# EAGLE board 3PScombo (EAGLE 7.2.0)
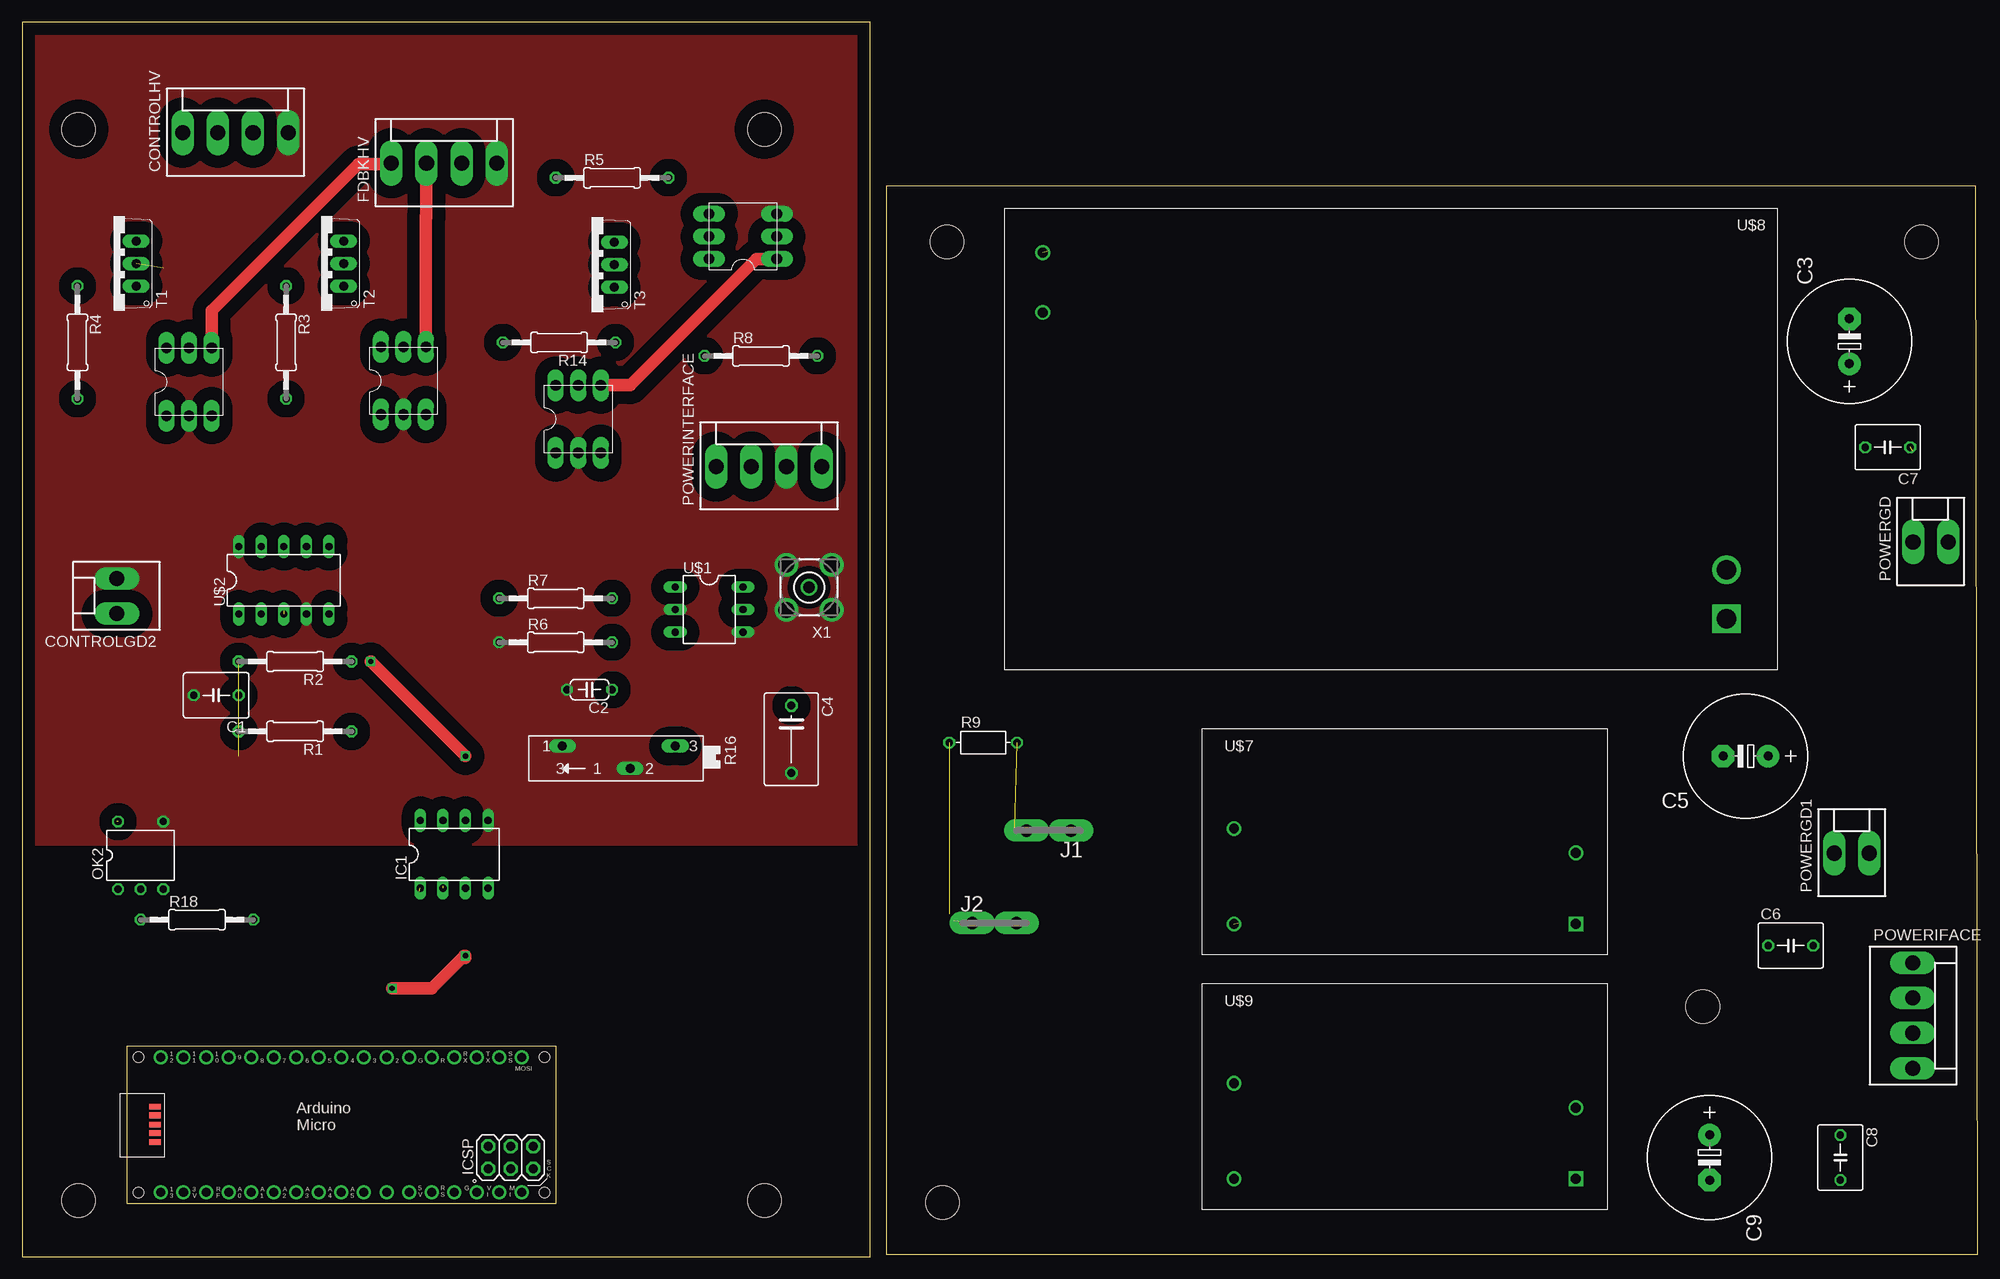
[diagram p0: board, top side]
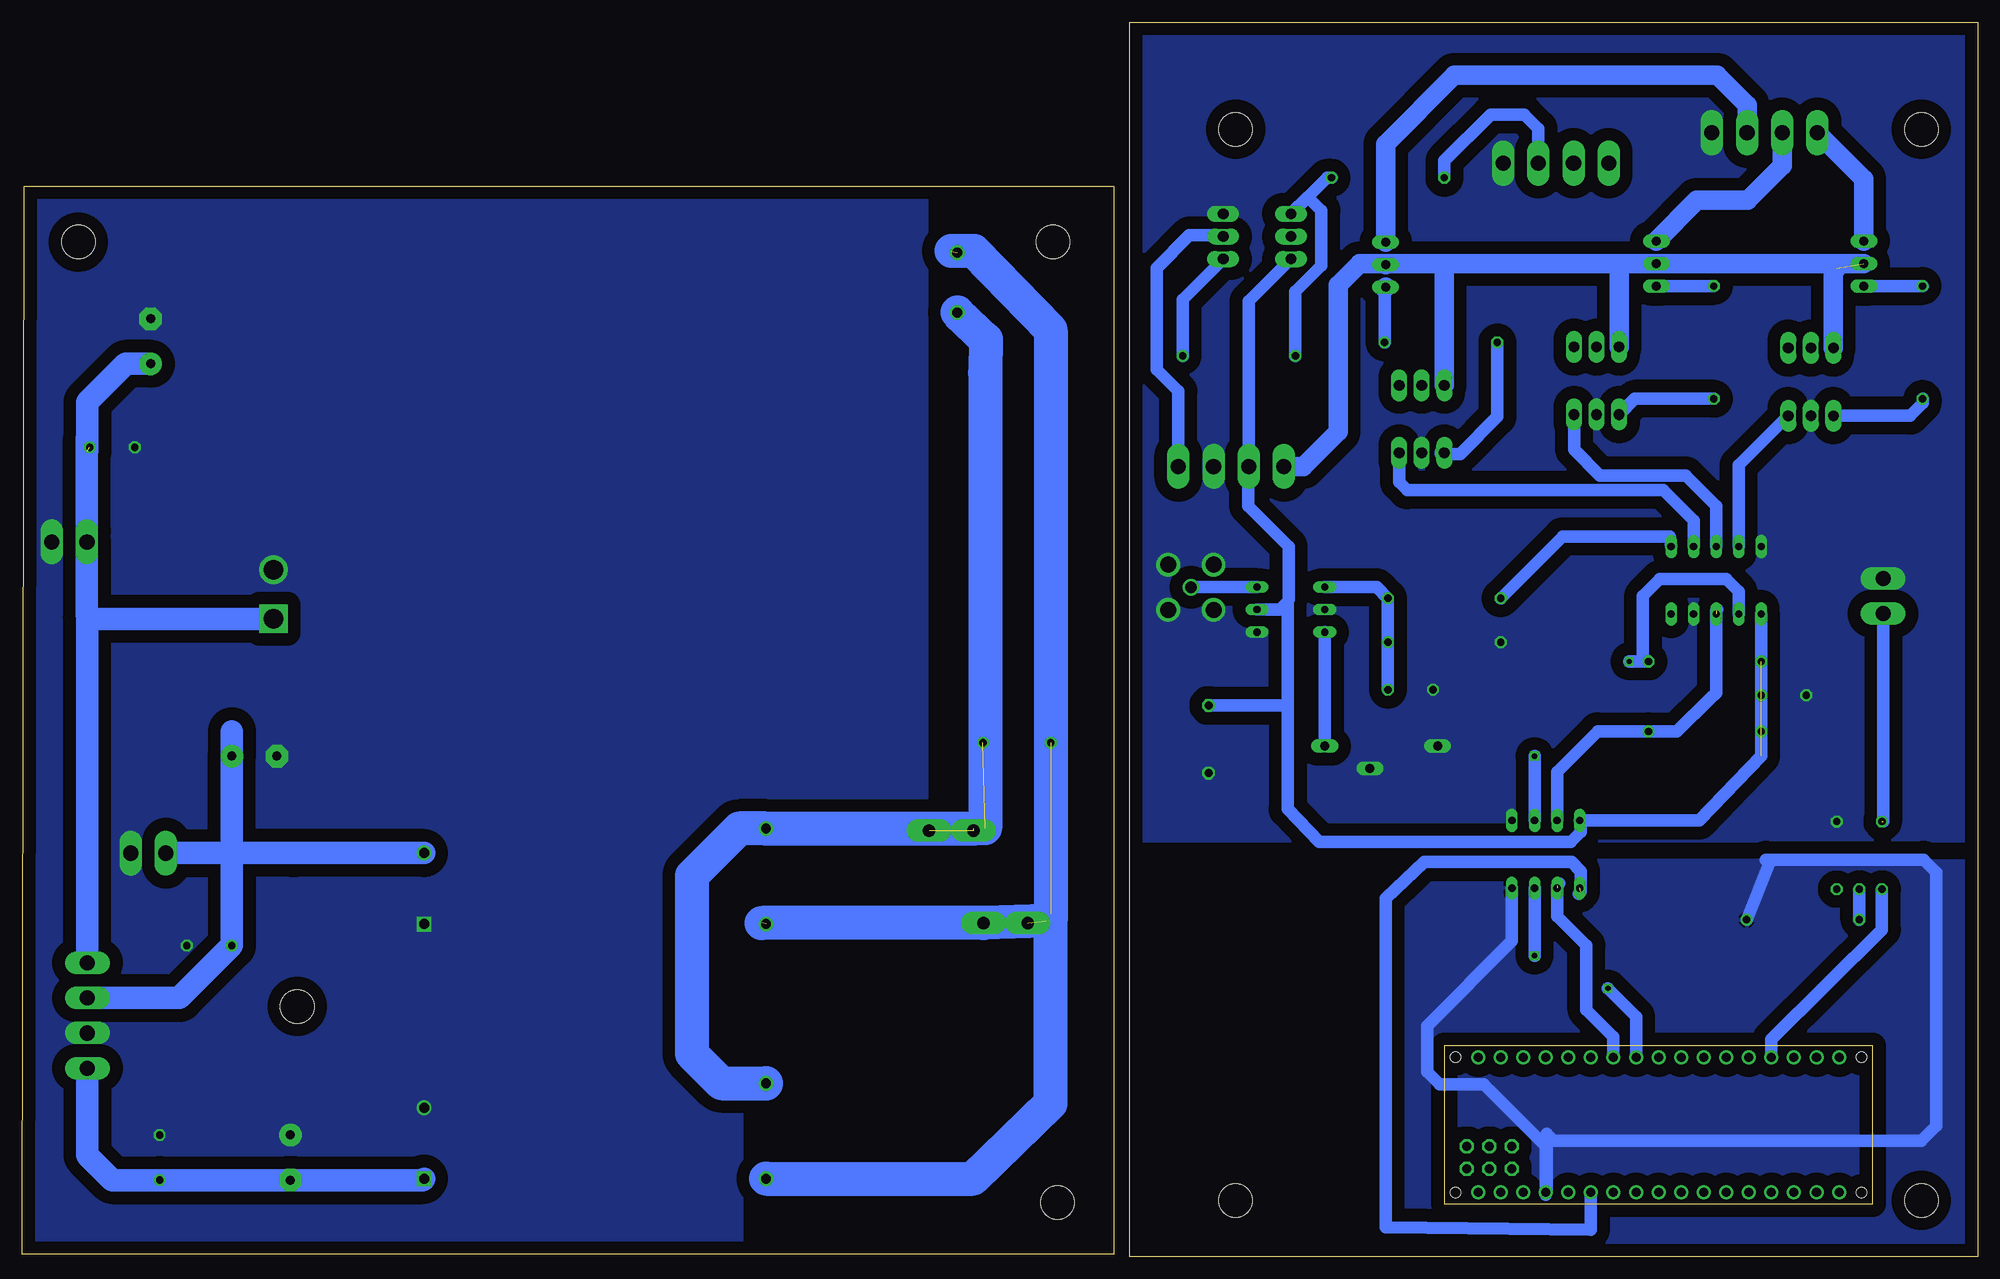
[diagram p1: board, bottom side, seen from below]

Size 220.2 x 139.06 mm. Coordinates in mm from the lower left corner, seen from the top.
Outline: 0,0 95.5,0 95.5,139.06 0,139.06 0,0
Outline: 97.28,0.25 220.2,0.25 219.94,120.57 97.28,120.57 97.28,0.25
Copper layers (1*16): Top 0.035mm / dielectric 1.5mm / Bottom 0.035mm
Design rules "default": minimum track width 10mil, minimum drill 24mil, track to track 8mil, track to pad 8mil, pad to pad 8mil, via to via 8mil, smd to smd 8mil, copper to edge 40mil, drill to drill 8mil, minimum pad ring 10mil, minimum via ring 8mil, stop-mask expansion 4mil, vias tented up to drill 0mil, thermal gap 10mil
Holes 3.8 mm at 83.57,6.35 83.57,127 6.35,127 6.35,6.35 213.87,114.3 189.23,28.19 104.14,114.3 103.63,6.1

## Footprints (pad centres in the part's own frame; a part is rotated, then mirrored left to right if it is on the bottom)
C050-050X075 = drill 0.813 octagon: 1 -2.54,0; 2 2.54,0
C050-024X044 = drill 0.813 octagon: 1 -2.54,0; 2 2.54,0
E5-13 = drill 1.016 pad 2.54: + -2.54,0 | drill 1.016 pad 2.54 octagon: - 2.54,0
C075-063X106 = drill 0.914 octagon: 1 -3.81,0; 2 3.81,0
KK-156-2 = drill 1.7 pad 2.184 long: 1 -1.98,0; 2 1.98,0
KK-156-4 = drill 1.7 pad 2.184 long: 1 -5.94,0; 2 -1.98,0; 3 1.98,0; 4 5.94,0
DIL08 = drill 0.813 long: 1 -3.81,-3.81; 2 -1.27,-3.81; 3 1.27,-3.81; 4 3.81,-3.81; 5 3.81,3.81; 6 1.27,3.81; 7 -1.27,3.81; 8 -3.81,3.81
F061.100 = drill 1.4 pad 2.54 long: A1 -2.5,0; A2 2.5,0
DIL05 = drill 0.813 octagon: 1 -2.54,-3.81; 2 0,-3.81; 3 2.54,-3.81; 4 2.54,3.81; 6 -2.54,3.81
ARDUINO_MICRO = drill 1.016 pad 1.575: 3V3 6.35,1.27; +5V 31.75,1.27; A0 11.43,1.27; A1 13.97,1.27; A2 16.51,1.27; A3 19.05,1.27; A4 21.59,1.27; A5 24.13,1.27; D2 29.21,16.51; D3 26.67,16.51; D4 24.13,16.51; D5 21.59,16.51; D6 19.05,16.51; D7 16.51,16.51; D8 13.97,16.51; D9 11.43,16.51; D10 8.89,16.51; D11 6.35,16.51; D12 3.81,16.51; D13 3.81,1.27; GND 31.75,16.51; GND. 36.83,1.27; MISO] 41.91,1.27; MOSI 44.45,16.51; NC 26.67,1.27; NC. 29.21,1.27; REF 8.89,1.27; RST 34.29,16.51; RST. 34.29,1.27; RX1 36.83,16.51; SCK 44.45,1.27; SS 41.91,16.51; TX1 39.37,16.51; VIN 39.37,1.27 | drill 1.016 pad 1.575 octagon: 5V 40.64,6.477; GND_ 45.72,6.477; MISO. 40.64,3.937; MOSI. 43.18,6.477; RESET.. 45.72,3.937; SCK. 43.18,3.937 | smd 1.27 x 0.635: <USB>+V 3.15,10.947; <USB>D+ 3.15,9.957; <USB>D- 3.15,8.941; <USB>GND 3.15,6.96; <USB>ID 3.15,7.976 | hole 1.2: 1.27,1.27; 1.27,16.51; 46.99,16.51; 46.99,1.27
0207/12 = drill 0.813 octagon: 1 -6.35,0; 2 6.35,0
R-7,5 = drill 0.813 octagon: 1 -3.81,0; 2 3.81,0
SP19L = drill 1.016 long: A 5.715,-1.27; E -6.985,-1.27; S -1.905,1.27
TO220V = drill 1.016 long: 1 -2.54,-2.54; 2 0,-2.54; 3 2.54,-2.54
DIL06 = drill 0.813 long: DIV 2.54,3.81; GND 0,-3.81; MOD -2.54,-3.81; OUT -2.54,3.81; SET 2.54,-3.81; VCC 0,3.81
DIL10 = drill 0.813 long: 1 -5.08,-3.81; 2 -2.54,-3.81; 3 0,-3.81; 4 2.54,-3.81; 5 5.08,-3.81; 6 5.08,3.81; 7 2.54,3.81; 8 0,3.81; 9 -2.54,3.81; 10 -5.08,3.81
DIL6 = drill 1.2 long: P$1 -2.54,-3.81; P$2 0,-3.81; P$3 2.54,-3.81; P$4 2.54,3.81; P$5 0,3.81; P$6 -2.54,3.81
IRM-05-05 = drill 1.1: +V 42.1,11.45; ACL 3.6,3.45; ACN 3.6,14.2 | drill 1.1 square: -V 42.1,3.45
IRM-60-12 = drill 2.2 square: P$1 5.7,46.25 | drill 2.2: P$2 5.7,40.75 | drill 1.1: P$3 82.7,5; P$4 82.7,11.75
BU-SMA-V = drill 1.27: 1 0,0 | drill 1.778: 2 -2.55,2.55; 3 2.55,2.55; 4 2.55,-2.55; 5 -2.55,-2.55

## Placement (x,y rotation side)
C1  [C050-050X075]  21.84,63.25 180 top
C2  10n  [C050-024X044]  63.88,63.88 180 top
C3  [E5-13]  205.74,103.12 90 top
C4  [C075-063X106]  86.61,58.29 270 top
C5  [E5-13]  194.06,56.39 180 top
C6  [C050-050X075]  199.14,35.05 0 top
C7  [C050-050X075]  210.06,91.19 180 top
C8  [C050-050X075]  204.72,11.18 270 top
C9  [E5-13]  189.99,11.18 270 top
CONTROLGD2  [KK-156-2]  10.67,74.42 90 top
CONTROLHV  [KK-156-4]  24,126.62 0 top
FDBKHV  [KK-156-4]  47.5,123.19 0 top
IC1  ISO1540  [DIL08]  48.64,45.34 0 top
J1  PIN2F061.100  [F061.100]  115.57,48.01 180 top
J2  PIN2F061.100  [F061.100]  109.47,37.59 0 top
OK2  H11F1  [DIL05]  13.34,45.21 0 top
PCB1  ARDUINO_MICRO  [ARDUINO_MICRO]  11.81,5.97 0 top
POWERGD  [KK-156-2]  214.88,80.52 0 top
POWERGD1  [KK-156-2]  205.99,45.47 0 top
POWERIFACE  [KK-156-4]  212.85,27.18 270 top
POWERINTERFACE  [KK-156-4]  84.07,89.03 0 top
R1  1.5k  [0207/12]  30.73,59.18 180 top
R2  1.5k  [0207/12]  30.73,67.06 180 top
R3  1k  [0207/12]  29.72,103 270 top
R4  1k  [0207/12]  6.22,103 270 top
R5  1k  [0207/12]  66.42,121.54 0 top
R6  10k  [0207/12]  60.07,69.22 0 top
R7  40k  [0207/12]  60.07,74.17 0 top
R8  1k  [0207/12]  83.19,101.47 0 top
R9  VARISTOR-7,5  [R-7,5]  108.2,57.91 0 top
R14  1k  [0207/12]  60.45,103 180 top
R16  [SP19L]  66.55,56.26 180 top
R18  100  [0207/12]  19.68,37.97 0 top
T1  TIP122V  [TO220V]  10.29,111.89 90 top
T2  TIP122V  [TO220V]  33.66,111.89 90 top
T3  TIP122V  [TO220V]  64.14,111.76 90 top
U$1  LTC6992  [DIL06]  77.34,72.9 270 top
U$2  MCP4728DIL  [DIL10]  29.46,76.2 0 top
U$3  OPA735DIL  [DIL6]  81.15,114.94 90 top
U$4  OPA735DIL  [DIL6]  62.61,94.36 0 top
U$5  OPA735DIL  [DIL6]  42.93,98.68 0 top
U$6  OPA735DIL  [DIL6]  18.8,98.55 0 top
U$7  IRM-05-05  [IRM-05-05]  132.84,34.04 0 top
U$8  IRM-60-12  [IRM-60-12]  197.61,118.11 180 top
U$9  IRM-05-05  [IRM-05-05]  132.84,5.33 0 top
X1  BU-SMA-V  [BU-SMA-V]  88.6,75.41 180 top

## Library data of the parts
C1 C3 C5-C9 R18 = rcl
C2 C4 R1-R8 R14 = resistor
CONTROLGD2 CONTROLHV FDBKHV POWERGD POWERGD1 POWERIFACE POWERINTERFACE = con-molex; OC_FARNELL: unknown; OC_NEWARK: unknown
IC1 U$3-U$6 = texas
J1 J2 = con-faston; OC_FARNELL: unknown; OC_NEWARK: unknown
OK2 = optocoupler; OC_FARNELL: unknown; OC_NEWARK: unknown
PCB1 = E14_Arduino_published
R9 = varistor
R16 = pot
T1-T3 = transistor-npn
U$1 = linear-technology
U$2 = microchip
U$7-U$9 = meanwell
X1 = con-coax; OC_FARNELL: unknown; OC_NEWARK: unknown

## Nets
+12V: POWERINTERFACE.1 T1.2 T2.2 T3.2 U$4.P$6 U$5.P$6 U$6.P$6
+12V1: C3.+ C7.1 POWERGD.1 POWERIFACE.1 U$8.P$1
-5V: POWERINTERFACE.4 U$3.P$2
-5V1: C8.2 C9.- POWERIFACE.4 U$9.-V
A+5: IC1.1 PCB1.+5V
AGND: IC1.4 PCB1.GND. R18.2
D4: PCB1.D4
D7: PCB1.D7
D8: PCB1.D8
D10: PCB1.D10
D11: PCB1.D11
ENSW2: CONTROLGD2.1 OK2.6
GND: C1.2 C2.2 C4.2 CONTROLGD2.2 CONTROLHV.4 FDBKHV.4 IC1.5 OK2.4 POWERINTERFACE.3 R6.1 R16.A R16.S U$1.DIV U$1.GND U$2.4 U$2.10 U$3.P$3 U$4.P$2 U$5.P$2 U$6.P$2 X1.2 X1.3 X1.4 X1.5
GND1: C3.- C5.- C6.2 C7.2 C8.1 C9.+ POWERGD1.2 POWERGD.2 POWERIFACE.3 U$7.-V U$8.P$2 U$9.+V
N$1: R7.1 U$2.6
N$2: C2.1 R6.2 R7.2 U$1.MOD
N$3: R4.1 T1.1
N$4: CONTROLHV.1 T1.3
N$5: CONTROLHV.3 T3.3
N$6: FDBKHV.2 U$5.P$4
N$7: OK2.2 R18.1
N$8: FDBKHV.1 U$6.P$4
N$9: FDBKHV.3 R5.1
N$10: R3.2 U$5.P$1
N$11: CONTROLHV.2 T2.3
N$12: R16.E U$1.SET
N$13: U$1.OUT X1.1
N$14: R8.2 U$3.P$1 U$4.P$4
N$15: R14.1 T3.1
N$16: U$2.9 U$6.P$3
N$17: U$2.8 U$5.P$3
N$18: U$2.7 U$4.P$3
N$19: R4.2 U$6.P$1
N$20: R3.1 T2.1
N$21: R14.2 U$4.P$1
N$23: R5.2 R8.1 U$3.P$4
N$24: J1.A1 J1.A2 R9.2 U$7.ACN U$8.P$4 U$9.ACN
N$25: J2.A1 J2.A2 R9.1 U$7.ACL U$8.P$3 U$9.ACL
PWM5: PCB1.D5
PWM6: PCB1.D6
PWM9: OK2.1 PCB1.D9
SCL: IC1.3 PCB1.D3
SCL_OUT: IC1.6 R2.1 U$2.2
SDA: IC1.2 PCB1.D2
SDA_OUT: IC1.7 R1.1 U$2.3
VCC: C1.1 C4.1 IC1.8 POWERINTERFACE.2 R1.2 R2.2 U$1.VCC U$2.1 U$3.P$6
VCC1: C5.+ C6.1 POWERGD1.1 POWERIFACE.2 U$7.+V

## Tracks (layer width: path | path; a pad name or v marks a point on that pad's centre or on a via)
+12V  (1 unrouted)
  Bottom 2.184: T1.2 T2.2 39.62,111.89 | 39.62,111.89 60.07,111.89 | 60.07,111.89 66.55,111.89 | 66.55,111.89 T3.2 | U$4.P$6 60.07,111.89 | U$5.P$6 40.39,111.12 39.62,111.89 | U$6.P$6 16.26,111 15.88,111.38 | POWERINTERFACE.1 75.95,89.03 72.01,92.96 72.01,109.47 69.6,111.89 66.55,111.89
+12V1  (1 unrouted)
  Bottom 2.54: 212.9,90.68 POWERGD.1 212.9,72.39 | 212.9,90.68 212.9,92.2 | C3.+ 208.53,100.58 212.85,96.27 212.85,90.73 212.9,90.68 | U$8.P$1 212.88,71.86 | 212.88,71.86 212.9,72.39 | 212.9,72.39 212.6,71.63 | POWERIFACE.1 212.85,71.83 212.88,71.86
-5V
  Bottom 1.422: POWERINTERFACE.4 90.01,97.51 92.46,99.95 92.46,111.38 88.77,115.06 85.09,115.06 U$3.P$2
-5V1
  Bottom 2.54: POWERIFACE.4 212.85,11.43 210.06,8.64 C8.2 C9.- 175.09,8.64 U$9.-V
A+5  (1 unrouted)
  Bottom 1.422: PCB1.+5V 43.56,3.05 66.67,3.3 66.67,40.39 62.36,44.45 45.72,44.45 44.7,43.43 44.7,41.15 44.96,40.89
AGND
  Bottom 1.422: IC1.4 52.45,35.56 61.98,26.04 61.98,20.83 60.58,19.43 55.63,19.43 48.64,12.45 PCB1.GND. | PCB1.GND. 48.64,6.99 | R18.2 23.5,44.32 23.88,44.7 6.1,44.7 4.7,43.31 4.7,14.73 6.35,13.08 47.75,13.08 48.51,13.84 48.51,7.37 PCB1.GND.
  pour Bottom (isolate 1.422): -0.13,0.13 95.76,0.25 95.76,44.83 0,44.58
ENSW2  (1 unrouted)
  Bottom 1.422: CONTROLGD2.1 10.67,49.02
GND
  pour Bottom (isolate 1.422, no thermals): 0,138.94 95.5,138.94 95.5,46.86 0,46.86
  pour Top (isolate 1.422, no thermals): 0,139.06 95.63,139.06 95.63,46.48 0,46.48
GND1
  pour Bottom (isolate 1.422, no thermals): 139.19,120.65 219.96,120.4 220.22,0.51 139.19,0.51
N$1
  Bottom 1.422: U$2.6 34.67,81.15 46.74,81.15 R7.1
N$2
  Bottom 1.422: U$1.MOD 67.69,75.44 R7.2 R6.2 C2.1
N$3
  Bottom 1.422: T1.1 R4.1
N$4
  Bottom 2.184: T1.3 12.83,121.38 CONTROLHV.1
N$5
  Bottom 2.184: CONTROLHV.3 25.98,129.74 29.34,133.1 58.93,133.1 66.67,125.35 T3.3
N$6
  Top 1.422: FDBKHV.2 45.52,117.04 45.47,117.22 U$5.P$4
N$7
  Bottom 1.422: R18.1 OK2.2
N$8
  Top 1.422: U$6.P$4 21.34,106.55 37.85,123.06 41.18,123.06 FDBKHV.1
N$9
  Bottom 1.422: FDBKHV.3 49.48,127.08 51.05,128.65 54.86,128.65 60.07,123.44 R5.1
N$10
  Bottom 1.422: R3.2 38.61,96.65 U$5.P$1
N$11
  Bottom 2.184: CONTROLHV.2 22.02,122.88 25.91,119 31.62,119 T2.3
N$12
  Bottom 1.422: U$1.SET R16.E
N$13
  Bottom 1.422: U$1.OUT 88.32,75.44 X1.1
N$14
  Top 1.422: U$3.P$1 82.68,112.39 68.45,98.17 U$4.P$4
  Bottom 1.422: R8.2 89.53,107.82 U$3.P$1
N$15
  Bottom 1.422: R14.1 66.8,109.09
  Bottom 2.184: 66.8,109.09 T3.1
N$16
  Bottom 1.422: U$2.9 26.92,89.15 U$6.P$3
N$17
  Bottom 1.422: U$2.8 29.46,84.58 32.89,88.01 42.55,88.01 45.47,90.93 U$5.P$3
N$18
  Bottom 1.422: U$2.7 32,82.93 35.43,86.36 64.26,86.36 65.15,87.25 U$4.P$3
N$19
  Bottom 1.422: R4.2 6.22,96.14 7.62,94.74 U$6.P$1
N$20
  Bottom 1.422: T2.1 R3.1
N$21
  Bottom 1.422: R14.2 54.1,94.61 58.29,90.42 59.94,90.42
  Bottom 2.184: 59.94,90.42 U$4.P$1
N$23
  Bottom 1.422: R5.2 73.28,121.54 75.44,119.38 | 75.44,119.38 U$3.P$4 | R8.1 76.83,108.71 73.91,111.63 73.91,117.86 75.44,119.38
N$24  (3 unrouted)
  Bottom 3.81: U$8.P$4 111.69,103.31 111.76,99.57 111.76,48.26 113.05,48.24 U$7.ACN 139.47,48.24 144.78,42.93 144.78,22.86 141.48,19.56 136.47,19.56 U$9.ACN
N$25  (4 unrouted)
  Bottom 3.81: 104.39,38.6 104.39,104.39 113.03,113.28 115.57,113.28 | 104.39,38.6 104.39,37.85 | 104.39,37.85 104.89,37.83 | 104.89,37.83 J2.A2 136.95,37.59 | U$9.ACL 113.14,8.78 104.39,17.27 104.39,37.85 | 104.39,38.6 104.89,37.83
N$26
  pour Bottom (isolate 1.422, no thermals): 118.36,120.14 140.21,120.14 140.46,51.31 118.36,51.56
PWM9
  Bottom 1.422: PCB1.D9 23.24,24.51 10.79,36.83 OK2.1
SCL  (via drill 0.6)
  Top 1.422: v41.66,30.23 46.1,30.23 49.78,33.91 49.91,33.66 v49.91,33.91
  Bottom 1.422: PCB1.D3 38.48,27.05 v41.66,30.23 | v49.91,33.91 IC1.3
SCL_OUT  (via drill 0.6)
  Top 1.422: v39.24,67.06 v49.91,56.39
  Bottom 1.422: U$2.2 26.92,74.93 28.32,76.33 35.81,76.33 37.72,74.42 37.72,67.69 R2.1 v39.24,67.06 | v49.91,56.39 IC1.6
SDA  (1 unrouted)
  Bottom 1.422: PCB1.D2 41.02,24.77 44.07,27.81 44.07,35.05 47.37,38.35 47.37,41.78 47.12,42.04
SDA_OUT  (1 unrouted)
  Bottom 1.422: IC1.7 47.37,54.61 42.8,59.18 R1.1 33.91,59.18 30.1,62.87 29.46,63.5 29.46,72.77 29.34,72.9
VCC  (3 unrouted)
  Bottom 1.422: 77.72,73.79 77.6,74.04 77.6,80.01 82.17,84.58 82.17,88.95 POWERINTERFACE.2 82.09,107.64 U$3.P$6 | 77.72,73.79 78.61,72.9 U$1.VCC | C4.1 77.72,62.1 | 77.72,62.1 77.72,73.79 | U$2.1 24.38,56.39 31.37,49.15 IC1.8 44.7,49.02 44.7,47.88 45.85,46.74 74.17,46.74 77.72,50.42 77.72,62.1
VCC1
  Bottom 2.54: U$7.+V 189.74,45.49 189.48,45.47 196.6,45.47 | 196.6,45.47 C5.+ 196.6,59.18 | 196.6,45.47 C6.1 202.49,29.16 POWERIFACE.2 | POWERGD1.1 196.6,45.47